# EAGLE board BradLightFlash.rev1-panou (EAGLE 6.5.0)
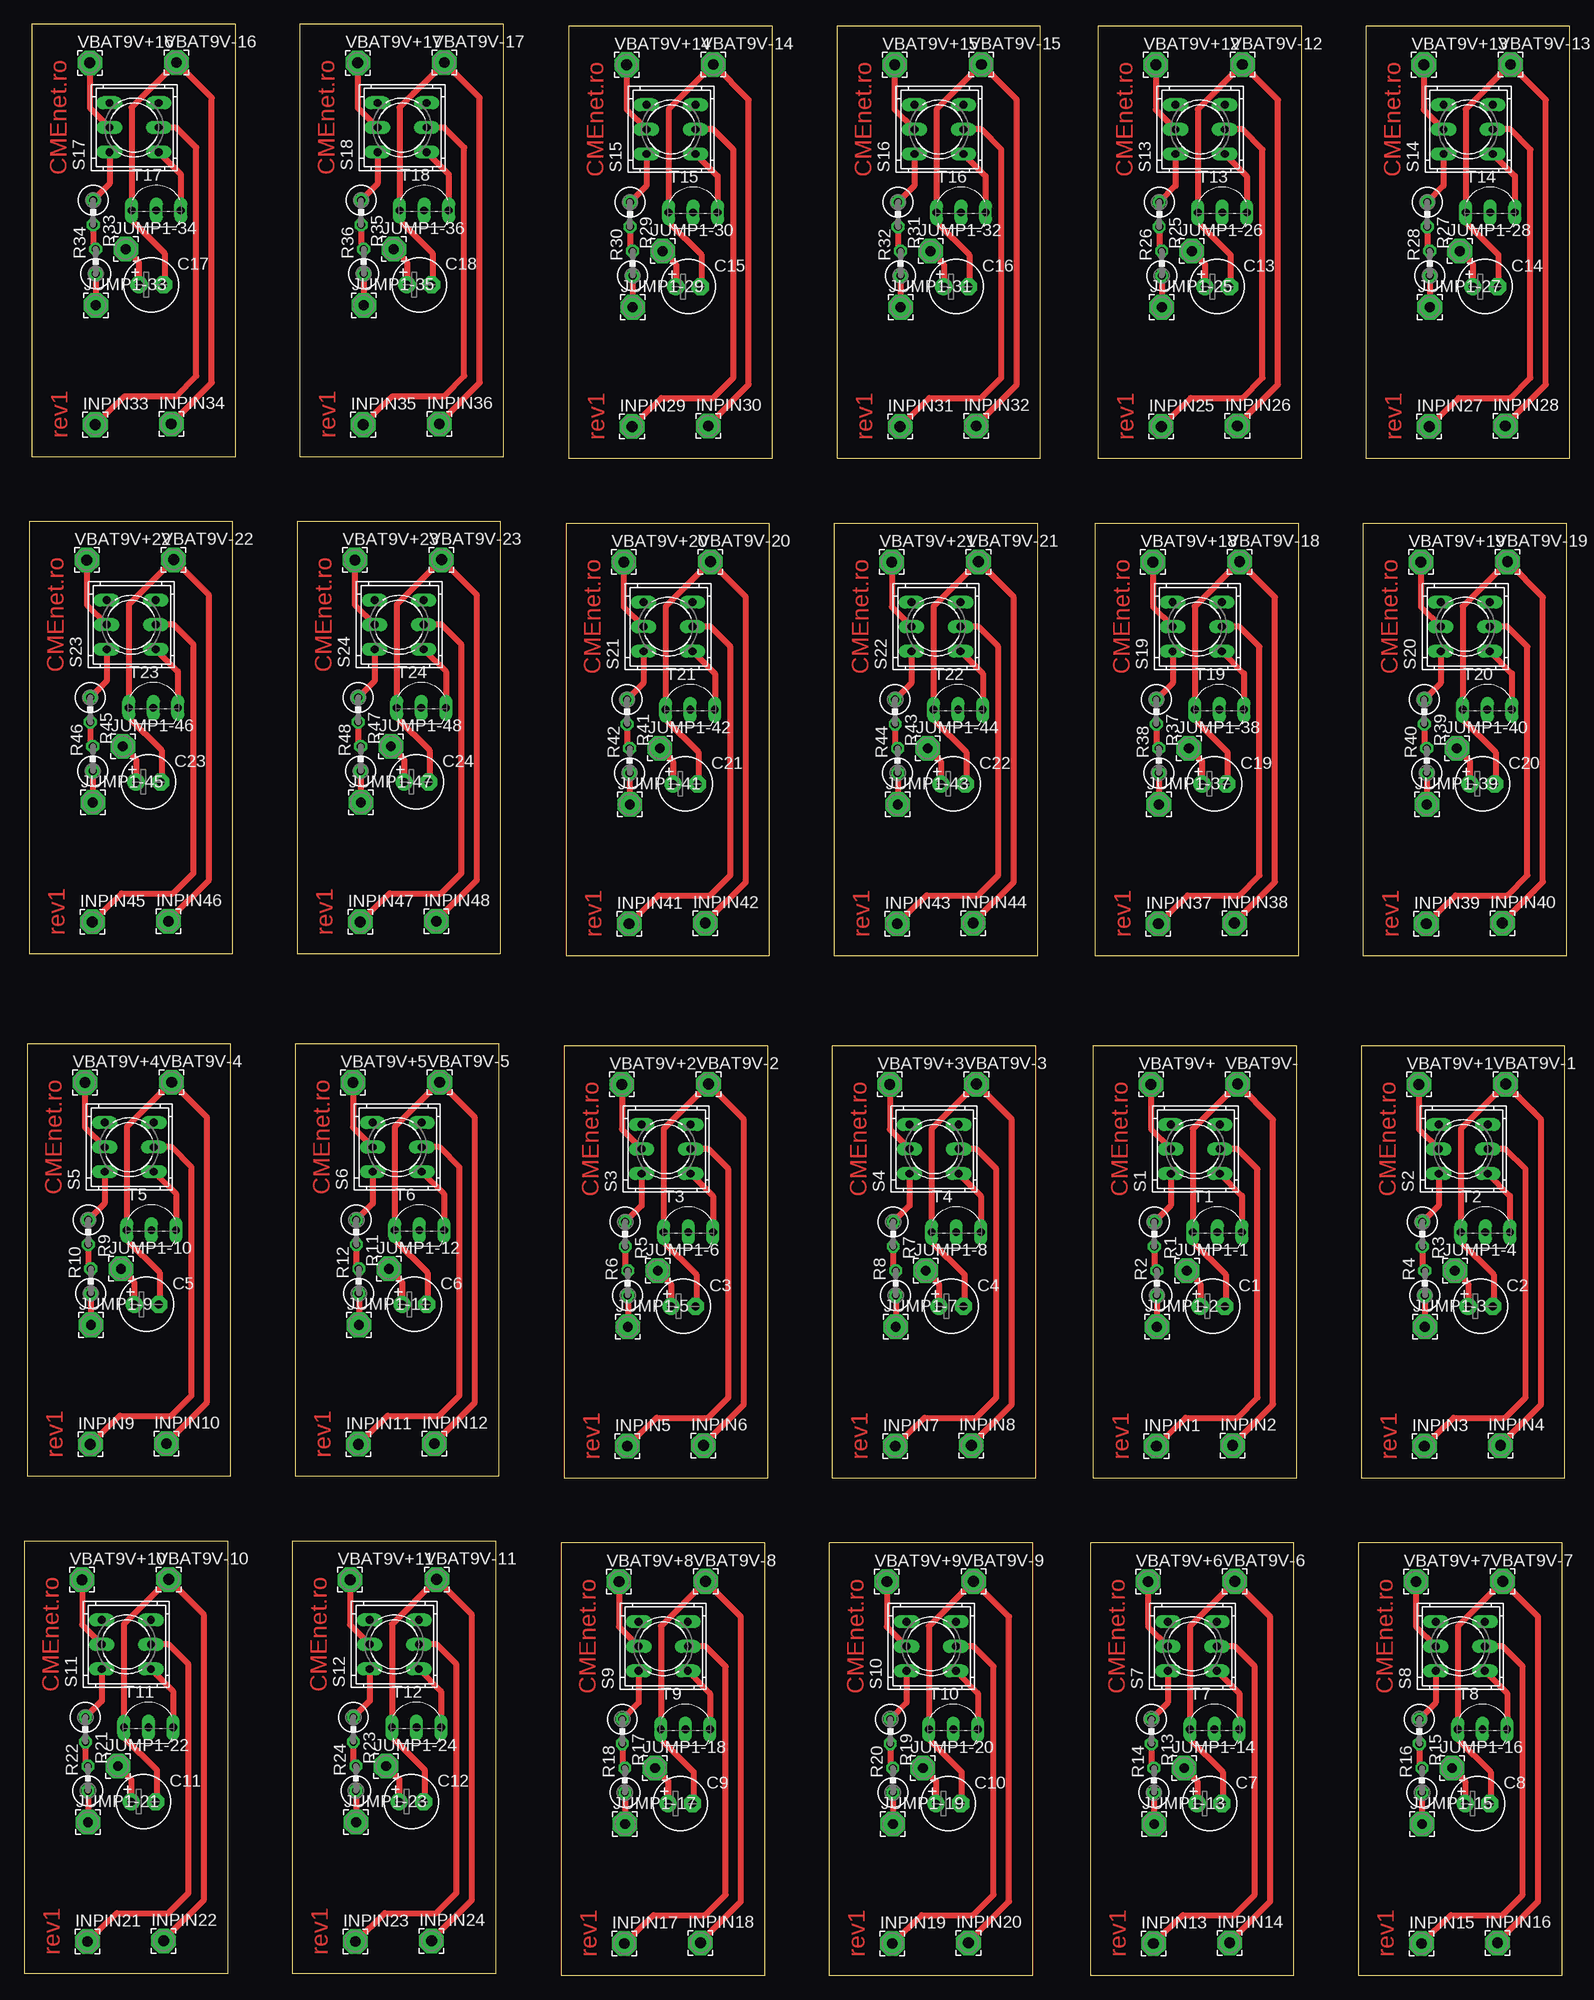
[diagram p0: board, top side]
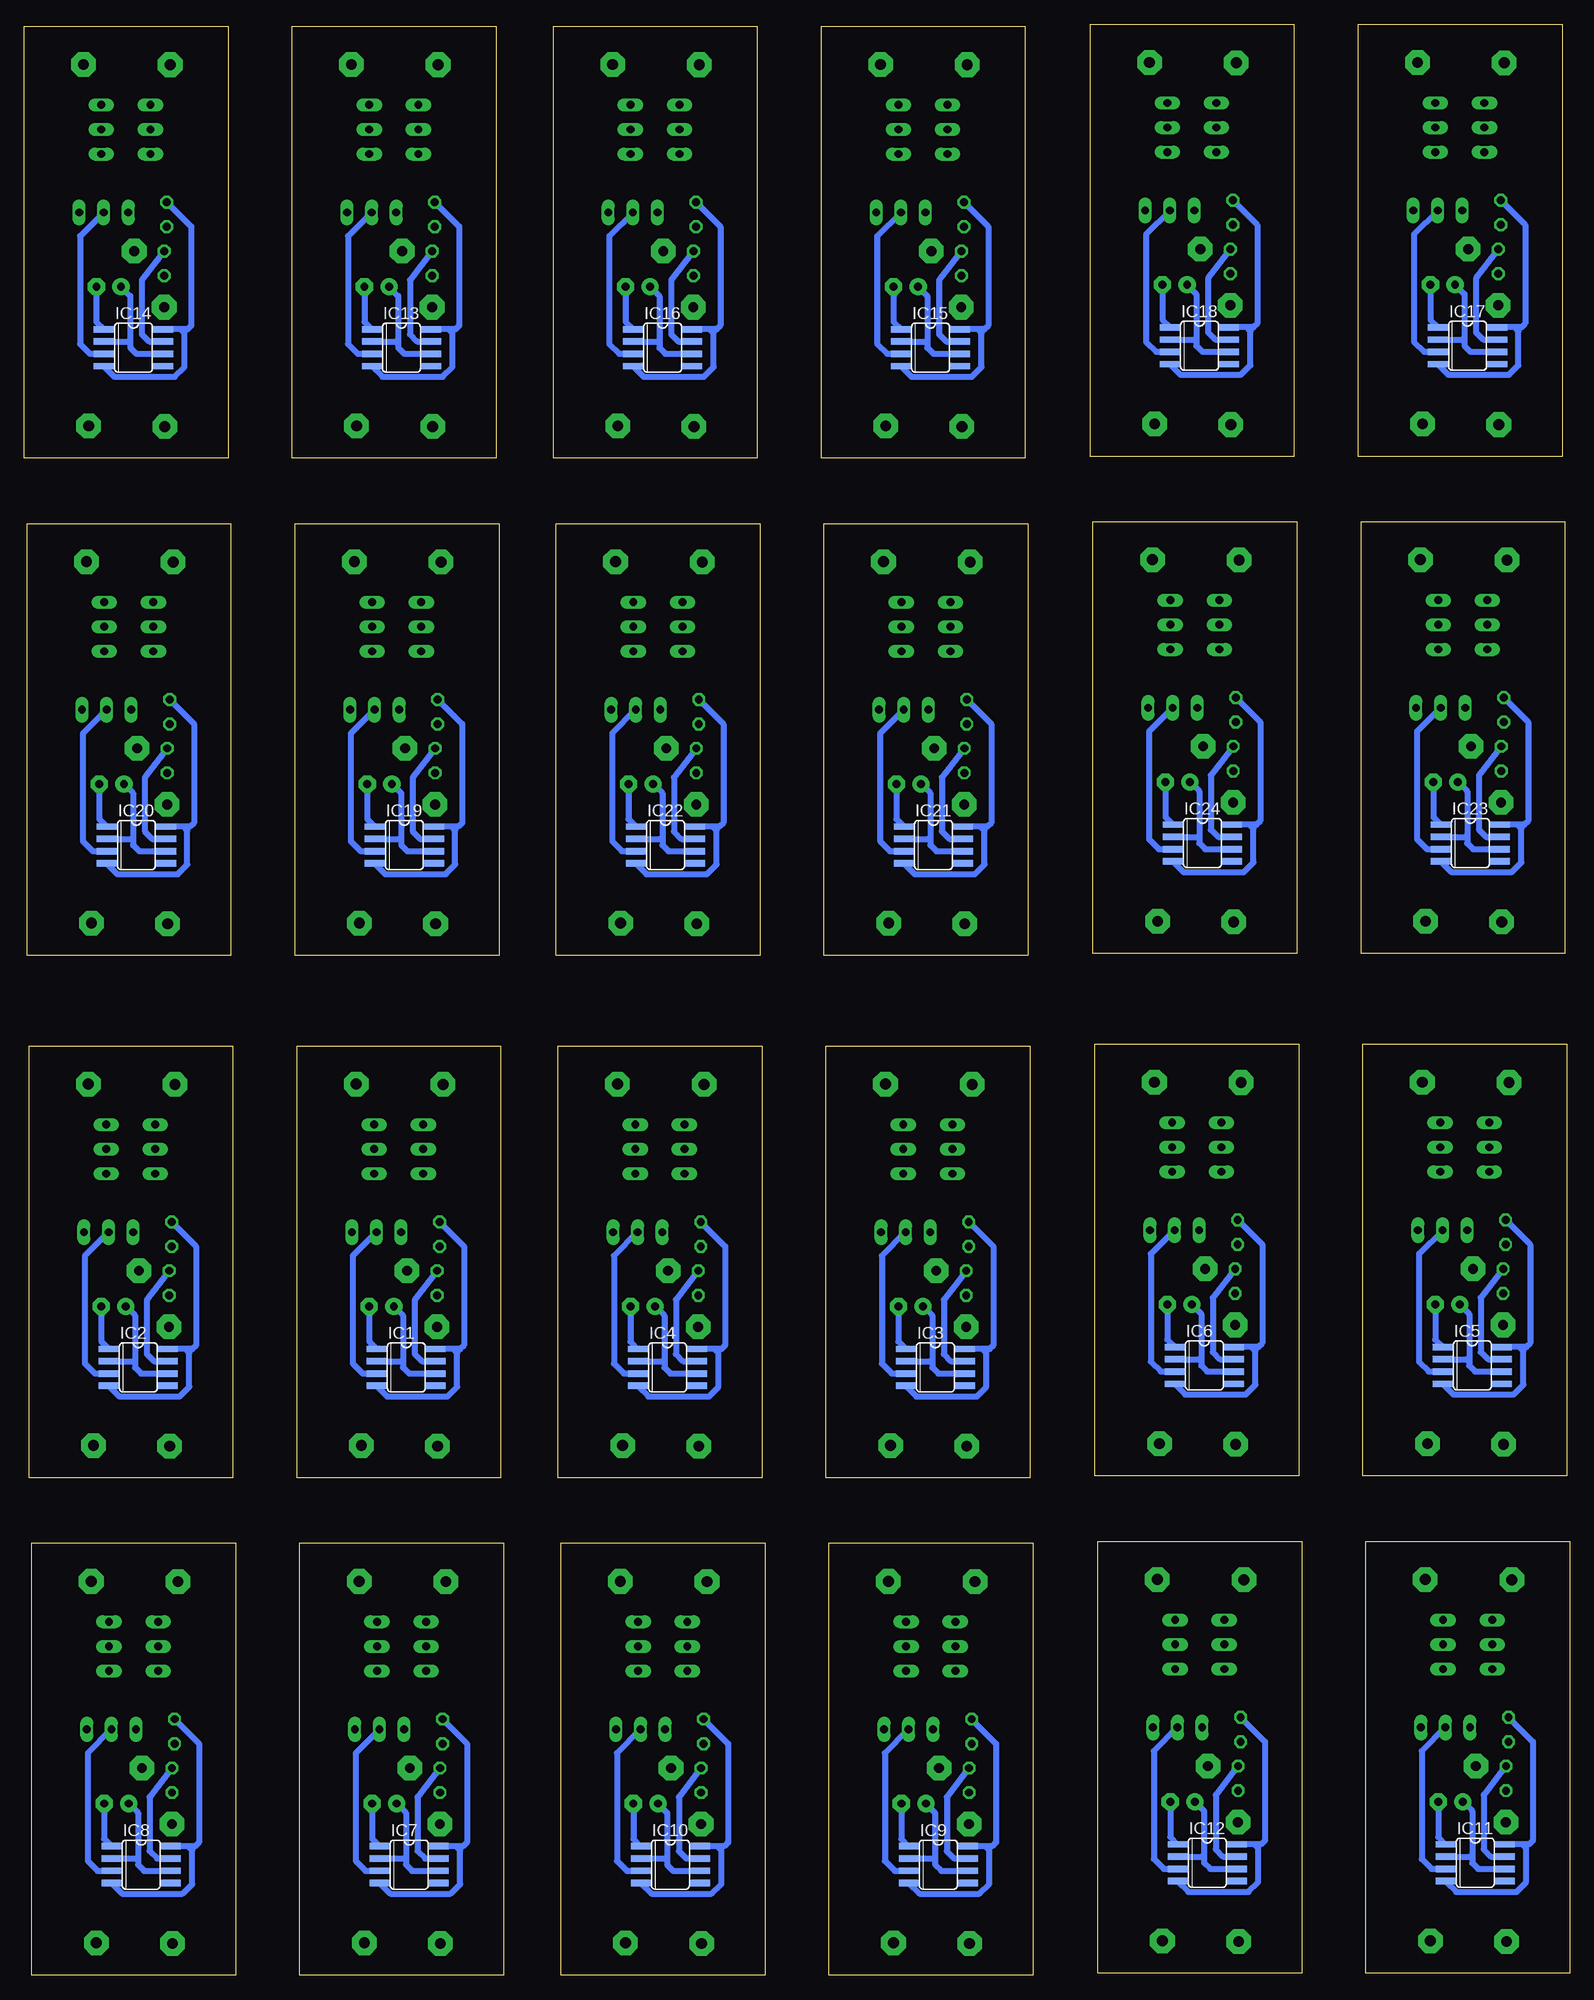
[diagram p1: board, bottom side, seen from below]

Size 159.77 x 201.68 mm. Coordinates in mm from the lower left corner, seen from the top.
Outline: 110.5,51.4 131.57,51.4 131.57,96.08 110.5,96.08 110.5,51.4
Outline: 138.2,51.4 159.27,51.4 159.27,96.08 138.2,96.08 138.2,51.4
Outline: 55.8,51.4 76.87,51.4 76.87,96.08 55.8,96.08 55.8,51.4
Outline: 83.5,51.4 104.57,51.4 104.57,96.08 83.5,96.08 83.5,51.4
Outline: 0.3,51.6 21.37,51.6 21.37,96.28 0.3,96.28 0.3,51.6
Outline: 28,51.6 49.07,51.6 49.07,96.28 28,96.28 28,51.6
Outline: 110.2,0 131.27,0 131.27,44.68 110.2,44.68 110.2,0
Outline: 137.9,0 158.97,0 158.97,44.68 137.9,44.68 137.9,0
Outline: 55.5,0 76.57,0 76.57,44.68 55.5,44.68 55.5,0
Outline: 83.2,0 104.27,0 104.27,44.68 83.2,44.68 83.2,0
Outline: 0,0.2 21.07,0.2 21.07,44.88 0,44.88 0,0.2
Outline: 27.7,0.2 48.77,0.2 48.77,44.88 27.7,44.88 27.7,0.2
Outline: 111,156.8 132.07,156.8 132.07,201.48 111,201.48 111,156.8
Outline: 138.7,156.8 159.77,156.8 159.77,201.48 138.7,201.48 138.7,156.8
Outline: 56.3,156.8 77.37,156.8 77.37,201.48 56.3,201.48 56.3,156.8
Outline: 84,156.8 105.07,156.8 105.07,201.48 84,201.48 84,156.8
Outline: 0.8,157 21.87,157 21.87,201.68 0.8,201.68 0.8,157
Outline: 28.5,157 49.57,157 49.57,201.68 28.5,201.68 28.5,157
Outline: 110.7,105.4 131.77,105.4 131.77,150.08 110.7,150.08 110.7,105.4
Outline: 138.4,105.4 159.47,105.4 159.47,150.08 138.4,150.08 138.4,105.4
Outline: 56,105.4 77.07,105.4 77.07,150.08 56,150.08 56,105.4
Outline: 83.7,105.4 104.77,105.4 104.77,150.08 83.7,150.08 83.7,105.4
Outline: 0.5,105.6 21.57,105.6 21.57,150.28 0.5,150.28 0.5,105.6
Outline: 28.2,105.6 49.27,105.6 49.27,150.28 28.2,150.28 28.2,105.6
Copper layers (1*16): Top 0.035mm / dielectric 1.5mm / Bottom 0.035mm
Design rules "default": minimum track width 10mil, minimum drill 24mil, track to track 8mil, track to pad 8mil, pad to pad 8mil, via to via 8mil, smd to smd 8mil, copper to edge 40mil, drill to drill 8mil, minimum pad ring 10mil, minimum via ring 8mil, stop-mask expansion 4mil, vias tented up to drill 0mil, thermal gap 10mil

## Footprints (pad centres in the part's own frame; a part is rotated, then mirrored left to right if it is on the bottom)
E2,5-6 = drill 0.813 pad 1.778: + -1.27,0 | drill 0.813 pad 1.778 octagon: - 1.27,0
SO08 = smd 0.66 x 2.032: 1 -1.905,-3.073; 2 -0.635,-3.073; 3 0.635,-3.073; 4 1.905,-3.073; 5 1.905,3.073; 6 0.635,3.073; 7 -0.635,3.073; 8 -1.905,3.073
2,54/1,1 = drill 1.118 pad 2.54 octagon: 1 0,0
2,54/1,0 = drill 1.016 pad 2.54 octagon: 1 0,0
0309V = drill 0.813 octagon: 1 -1.27,0; 2 1.27,0
9077-2 = drill 0.813 long: 1 -2.54,2.54; 2 0,2.54; 3 2.54,2.54; 4 -2.54,-2.54; 5 0,-2.54; 6 2.54,-2.54
TO92-EBC-OVAL = drill 0.813 long: B 0,-1.27; C 2.54,-1.27; E -2.54,-1.27

## Placement (x,y rotation side)
C1  470uF  [E2,5-6]  122.83,69.15 0 top
C2  470uF  [E2,5-6]  150.53,69.15 0 top
C3  470uF  [E2,5-6]  68.13,69.15 0 top
C4  470uF  [E2,5-6]  95.83,69.15 0 top
C5  470uF  [E2,5-6]  12.63,69.35 0 top
C6  470uF  [E2,5-6]  40.33,69.35 0 top
C7  470uF  [E2,5-6]  122.53,17.75 0 top
C8  470uF  [E2,5-6]  150.23,17.75 0 top
C9  470uF  [E2,5-6]  67.83,17.75 0 top
C10  470uF  [E2,5-6]  95.53,17.75 0 top
C11  470uF  [E2,5-6]  12.33,17.95 0 top
C12  470uF  [E2,5-6]  40.03,17.95 0 top
C13  470uF  [E2,5-6]  123.33,174.55 0 top
C14  470uF  [E2,5-6]  151.03,174.55 0 top
C15  470uF  [E2,5-6]  68.63,174.55 0 top
C16  470uF  [E2,5-6]  96.33,174.55 0 top
C17  470uF  [E2,5-6]  13.13,174.75 0 top
C18  470uF  [E2,5-6]  40.83,174.75 0 top
C19  470uF  [E2,5-6]  123.03,123.15 0 top
C20  470uF  [E2,5-6]  150.73,123.15 0 top
C21  470uF  [E2,5-6]  68.33,123.15 0 top
C22  470uF  [E2,5-6]  96.03,123.15 0 top
C23  470uF  [E2,5-6]  12.83,123.35 0 top
C24  470uF  [E2,5-6]  40.53,123.35 0 top
IC1  NE555D  [SO08]  120.27,62.84 270 bottom
IC2  NE555D  [SO08]  147.97,62.84 270 bottom
IC3  NE555D  [SO08]  65.57,62.84 270 bottom
IC4  NE555D  [SO08]  93.27,62.84 270 bottom
IC5  NE555D  [SO08]  10.07,63.04 270 bottom
IC6  NE555D  [SO08]  37.77,63.04 270 bottom
IC7  NE555D  [SO08]  119.97,11.44 270 bottom
IC8  NE555D  [SO08]  147.67,11.44 270 bottom
IC9  NE555D  [SO08]  65.27,11.44 270 bottom
IC10  NE555D  [SO08]  92.97,11.44 270 bottom
IC11  NE555D  [SO08]  9.77,11.64 270 bottom
IC12  NE555D  [SO08]  37.47,11.64 270 bottom
IC13  NE555D  [SO08]  120.77,168.24 270 bottom
IC14  NE555D  [SO08]  148.47,168.24 270 bottom
IC15  NE555D  [SO08]  66.07,168.24 270 bottom
IC16  NE555D  [SO08]  93.77,168.24 270 bottom
IC17  NE555D  [SO08]  10.57,168.44 270 bottom
IC18  NE555D  [SO08]  38.27,168.44 270 bottom
IC19  NE555D  [SO08]  120.47,116.84 270 bottom
IC20  NE555D  [SO08]  148.17,116.84 270 bottom
IC21  NE555D  [SO08]  65.77,116.84 270 bottom
IC22  NE555D  [SO08]  93.47,116.84 270 bottom
IC23  NE555D  [SO08]  10.27,117.04 270 bottom
IC24  NE555D  [SO08]  37.97,117.04 270 bottom
INPIN1  INPIN1  [2,54/1,1]  117.04,54.69 0 top
INPIN2  INPIN2  [2,54/1,1]  124.91,54.76 0 top
INPIN3  INPIN1  [2,54/1,1]  144.74,54.69 0 top
INPIN4  INPIN2  [2,54/1,1]  152.61,54.76 0 top
INPIN5  INPIN1  [2,54/1,1]  62.34,54.69 0 top
INPIN6  INPIN2  [2,54/1,1]  70.21,54.76 0 top
INPIN7  INPIN1  [2,54/1,1]  90.04,54.69 0 top
INPIN8  INPIN2  [2,54/1,1]  97.91,54.76 0 top
INPIN9  INPIN1  [2,54/1,1]  6.84,54.89 0 top
INPIN10  INPIN2  [2,54/1,1]  14.71,54.96 0 top
INPIN11  INPIN1  [2,54/1,1]  34.54,54.89 0 top
INPIN12  INPIN2  [2,54/1,1]  42.41,54.96 0 top
INPIN13  INPIN1  [2,54/1,1]  116.74,3.29 0 top
INPIN14  INPIN2  [2,54/1,1]  124.61,3.36 0 top
INPIN15  INPIN1  [2,54/1,1]  144.44,3.29 0 top
INPIN16  INPIN2  [2,54/1,1]  152.31,3.36 0 top
INPIN17  INPIN1  [2,54/1,1]  62.04,3.29 0 top
INPIN18  INPIN2  [2,54/1,1]  69.91,3.36 0 top
INPIN19  INPIN1  [2,54/1,1]  89.74,3.29 0 top
INPIN20  INPIN2  [2,54/1,1]  97.61,3.36 0 top
INPIN21  INPIN1  [2,54/1,1]  6.54,3.49 0 top
INPIN22  INPIN2  [2,54/1,1]  14.41,3.56 0 top
INPIN23  INPIN1  [2,54/1,1]  34.24,3.49 0 top
INPIN24  INPIN2  [2,54/1,1]  42.11,3.56 0 top
INPIN25  INPIN1  [2,54/1,1]  117.54,160.09 0 top
INPIN26  INPIN2  [2,54/1,1]  125.41,160.16 0 top
INPIN27  INPIN1  [2,54/1,1]  145.24,160.09 0 top
INPIN28  INPIN2  [2,54/1,1]  153.11,160.16 0 top
INPIN29  INPIN1  [2,54/1,1]  62.84,160.09 0 top
INPIN30  INPIN2  [2,54/1,1]  70.71,160.16 0 top
INPIN31  INPIN1  [2,54/1,1]  90.54,160.09 0 top
INPIN32  INPIN2  [2,54/1,1]  98.41,160.16 0 top
INPIN33  INPIN1  [2,54/1,1]  7.34,160.29 0 top
INPIN34  INPIN2  [2,54/1,1]  15.21,160.36 0 top
INPIN35  INPIN1  [2,54/1,1]  35.04,160.29 0 top
INPIN36  INPIN2  [2,54/1,1]  42.91,160.36 0 top
INPIN37  INPIN1  [2,54/1,1]  117.24,108.69 0 top
INPIN38  INPIN2  [2,54/1,1]  125.11,108.76 0 top
INPIN39  INPIN1  [2,54/1,1]  144.94,108.69 0 top
INPIN40  INPIN2  [2,54/1,1]  152.81,108.76 0 top
INPIN41  INPIN1  [2,54/1,1]  62.54,108.69 0 top
INPIN42  INPIN2  [2,54/1,1]  70.41,108.76 0 top
INPIN43  INPIN1  [2,54/1,1]  90.24,108.69 0 top
INPIN44  INPIN2  [2,54/1,1]  98.11,108.76 0 top
INPIN45  INPIN1  [2,54/1,1]  7.04,108.89 0 top
INPIN46  INPIN2  [2,54/1,1]  14.91,108.96 0 top
INPIN47  INPIN1  [2,54/1,1]  34.74,108.89 0 top
INPIN48  INPIN2  [2,54/1,1]  42.61,108.96 0 top
JUMP1-1  [2,54/1,0]  120.2,72.83 0 top
JUMP1-2  [2,54/1,0]  117.1,67.03 0 top
JUMP1-3  [2,54/1,0]  144.8,67.03 0 top
JUMP1-4  [2,54/1,0]  147.9,72.83 0 top
JUMP1-5  [2,54/1,0]  62.4,67.03 0 top
JUMP1-6  [2,54/1,0]  65.5,72.83 0 top
JUMP1-7  [2,54/1,0]  90.1,67.03 0 top
JUMP1-8  [2,54/1,0]  93.2,72.83 0 top
JUMP1-9  [2,54/1,0]  6.9,67.23 0 top
JUMP1-10  [2,54/1,0]  10,73.03 0 top
JUMP1-11  [2,54/1,0]  34.6,67.23 0 top
JUMP1-12  [2,54/1,0]  37.7,73.03 0 top
JUMP1-13  [2,54/1,0]  116.8,15.63 0 top
JUMP1-14  [2,54/1,0]  119.9,21.43 0 top
JUMP1-15  [2,54/1,0]  144.5,15.63 0 top
JUMP1-16  [2,54/1,0]  147.6,21.43 0 top
JUMP1-17  [2,54/1,0]  62.1,15.63 0 top
JUMP1-18  [2,54/1,0]  65.2,21.43 0 top
JUMP1-19  [2,54/1,0]  89.8,15.63 0 top
JUMP1-20  [2,54/1,0]  92.9,21.43 0 top
JUMP1-21  [2,54/1,0]  6.6,15.83 0 top
JUMP1-22  [2,54/1,0]  9.7,21.63 0 top
JUMP1-23  [2,54/1,0]  34.3,15.83 0 top
JUMP1-24  [2,54/1,0]  37.4,21.63 0 top
JUMP1-25  [2,54/1,0]  117.6,172.43 0 top
JUMP1-26  [2,54/1,0]  120.7,178.23 0 top
JUMP1-27  [2,54/1,0]  145.3,172.43 0 top
JUMP1-28  [2,54/1,0]  148.4,178.23 0 top
JUMP1-29  [2,54/1,0]  62.9,172.43 0 top
JUMP1-30  [2,54/1,0]  66,178.23 0 top
JUMP1-31  [2,54/1,0]  90.6,172.43 0 top
JUMP1-32  [2,54/1,0]  93.7,178.23 0 top
JUMP1-33  [2,54/1,0]  7.4,172.63 0 top
JUMP1-34  [2,54/1,0]  10.5,178.43 0 top
JUMP1-35  [2,54/1,0]  35.1,172.63 0 top
JUMP1-36  [2,54/1,0]  38.2,178.43 0 top
JUMP1-37  [2,54/1,0]  117.3,121.03 0 top
JUMP1-38  [2,54/1,0]  120.4,126.83 0 top
JUMP1-39  [2,54/1,0]  145,121.03 0 top
JUMP1-40  [2,54/1,0]  148.1,126.83 0 top
JUMP1-41  [2,54/1,0]  62.6,121.03 0 top
JUMP1-42  [2,54/1,0]  65.7,126.83 0 top
JUMP1-43  [2,54/1,0]  90.3,121.03 0 top
JUMP1-44  [2,54/1,0]  93.4,126.83 0 top
JUMP1-45  [2,54/1,0]  7.1,121.23 0 top
JUMP1-46  [2,54/1,0]  10.2,127.03 0 top
JUMP1-47  [2,54/1,0]  34.8,121.23 0 top
JUMP1-48  [2,54/1,0]  37.9,127.03 0 top
R1  1K  [0309V]  116.83,76.61 270 top
R2  1k  [0309V]  117.09,71.56 90 top
R3  1K  [0309V]  144.53,76.61 270 top
R4  1k  [0309V]  144.79,71.56 90 top
R5  1K  [0309V]  62.13,76.61 270 top
R6  1k  [0309V]  62.39,71.56 90 top
R7  1K  [0309V]  89.83,76.61 270 top
R8  1k  [0309V]  90.09,71.56 90 top
R9  1K  [0309V]  6.63,76.81 270 top
R10  1k  [0309V]  6.89,71.76 90 top
R11  1K  [0309V]  34.33,76.81 270 top
R12  1k  [0309V]  34.59,71.76 90 top
R13  1K  [0309V]  116.53,25.21 270 top
R14  1k  [0309V]  116.79,20.16 90 top
R15  1K  [0309V]  144.23,25.21 270 top
R16  1k  [0309V]  144.49,20.16 90 top
R17  1K  [0309V]  61.83,25.21 270 top
R18  1k  [0309V]  62.09,20.16 90 top
R19  1K  [0309V]  89.53,25.21 270 top
R20  1k  [0309V]  89.79,20.16 90 top
R21  1K  [0309V]  6.33,25.41 270 top
R22  1k  [0309V]  6.59,20.36 90 top
R23  1K  [0309V]  34.03,25.41 270 top
R24  1k  [0309V]  34.29,20.36 90 top
R25  1K  [0309V]  117.33,182.01 270 top
R26  1k  [0309V]  117.59,176.96 90 top
R27  1K  [0309V]  145.03,182.01 270 top
R28  1k  [0309V]  145.29,176.96 90 top
R29  1K  [0309V]  62.63,182.01 270 top
R30  1k  [0309V]  62.89,176.96 90 top
R31  1K  [0309V]  90.33,182.01 270 top
R32  1k  [0309V]  90.59,176.96 90 top
R33  1K  [0309V]  7.13,182.21 270 top
R34  1k  [0309V]  7.39,177.16 90 top
R35  1K  [0309V]  34.83,182.21 270 top
R36  1k  [0309V]  35.09,177.16 90 top
R37  1K  [0309V]  117.03,130.61 270 top
R38  1k  [0309V]  117.29,125.56 90 top
R39  1K  [0309V]  144.73,130.61 270 top
R40  1k  [0309V]  144.99,125.56 90 top
R41  1K  [0309V]  62.33,130.61 270 top
R42  1k  [0309V]  62.59,125.56 90 top
R43  1K  [0309V]  90.03,130.61 270 top
R44  1k  [0309V]  90.29,125.56 90 top
R45  1K  [0309V]  6.83,130.81 270 top
R46  1k  [0309V]  7.09,125.76 90 top
R47  1K  [0309V]  34.53,130.81 270 top
R48  1k  [0309V]  34.79,125.76 90 top
S1  9077-2  [9077-2]  121.06,85.4 90 top
S2  9077-2  [9077-2]  148.76,85.4 90 top
S3  9077-2  [9077-2]  66.36,85.4 90 top
S4  9077-2  [9077-2]  94.06,85.4 90 top
S5  9077-2  [9077-2]  10.86,85.6 90 top
S6  9077-2  [9077-2]  38.56,85.6 90 top
S7  9077-2  [9077-2]  120.76,34 90 top
S8  9077-2  [9077-2]  148.46,34 90 top
S9  9077-2  [9077-2]  66.06,34 90 top
S10  9077-2  [9077-2]  93.76,34 90 top
S11  9077-2  [9077-2]  10.56,34.2 90 top
S12  9077-2  [9077-2]  38.26,34.2 90 top
S13  9077-2  [9077-2]  121.56,190.8 90 top
S14  9077-2  [9077-2]  149.26,190.8 90 top
S15  9077-2  [9077-2]  66.86,190.8 90 top
S16  9077-2  [9077-2]  94.56,190.8 90 top
S17  9077-2  [9077-2]  11.36,191 90 top
S18  9077-2  [9077-2]  39.06,191 90 top
S19  9077-2  [9077-2]  121.26,139.4 90 top
S20  9077-2  [9077-2]  148.96,139.4 90 top
S21  9077-2  [9077-2]  66.56,139.4 90 top
S22  9077-2  [9077-2]  94.26,139.4 90 top
S23  9077-2  [9077-2]  11.06,139.6 90 top
S24  9077-2  [9077-2]  38.76,139.6 90 top
T1  2N2222  [TO92-EBC-OVAL]  123.35,78.09 0 top
T2  2N2222  [TO92-EBC-OVAL]  151.05,78.09 0 top
T3  2N2222  [TO92-EBC-OVAL]  68.65,78.09 0 top
T4  2N2222  [TO92-EBC-OVAL]  96.35,78.09 0 top
T5  2N2222  [TO92-EBC-OVAL]  13.15,78.29 0 top
T6  2N2222  [TO92-EBC-OVAL]  40.85,78.29 0 top
T7  2N2222  [TO92-EBC-OVAL]  123.05,26.69 0 top
T8  2N2222  [TO92-EBC-OVAL]  150.75,26.69 0 top
T9  2N2222  [TO92-EBC-OVAL]  68.35,26.69 0 top
T10  2N2222  [TO92-EBC-OVAL]  96.05,26.69 0 top
T11  2N2222  [TO92-EBC-OVAL]  12.85,26.89 0 top
T12  2N2222  [TO92-EBC-OVAL]  40.55,26.89 0 top
T13  2N2222  [TO92-EBC-OVAL]  123.85,183.49 0 top
T14  2N2222  [TO92-EBC-OVAL]  151.55,183.49 0 top
T15  2N2222  [TO92-EBC-OVAL]  69.15,183.49 0 top
T16  2N2222  [TO92-EBC-OVAL]  96.85,183.49 0 top
T17  2N2222  [TO92-EBC-OVAL]  13.65,183.69 0 top
T18  2N2222  [TO92-EBC-OVAL]  41.35,183.69 0 top
T19  2N2222  [TO92-EBC-OVAL]  123.55,132.09 0 top
T20  2N2222  [TO92-EBC-OVAL]  151.25,132.09 0 top
T21  2N2222  [TO92-EBC-OVAL]  68.85,132.09 0 top
T22  2N2222  [TO92-EBC-OVAL]  96.55,132.09 0 top
T23  2N2222  [TO92-EBC-OVAL]  13.35,132.29 0 top
T24  2N2222  [TO92-EBC-OVAL]  41.05,132.29 0 top
VBAT9V+  VBAT9v+  [2,54/1,1]  116.48,92.09 0 top
VBAT9V+1  VBAT9v+  [2,54/1,1]  144.18,92.09 0 top
VBAT9V+2  VBAT9v+  [2,54/1,1]  61.78,92.09 0 top
VBAT9V+3  VBAT9v+  [2,54/1,1]  89.48,92.09 0 top
VBAT9V+4  VBAT9v+  [2,54/1,1]  6.28,92.29 0 top
VBAT9V+5  VBAT9v+  [2,54/1,1]  33.98,92.29 0 top
VBAT9V+6  VBAT9v+  [2,54/1,1]  116.18,40.69 0 top
VBAT9V+7  VBAT9v+  [2,54/1,1]  143.88,40.69 0 top
VBAT9V+8  VBAT9v+  [2,54/1,1]  61.48,40.69 0 top
VBAT9V+9  VBAT9v+  [2,54/1,1]  89.18,40.69 0 top
VBAT9V+10  VBAT9v+  [2,54/1,1]  5.98,40.89 0 top
VBAT9V+11  VBAT9v+  [2,54/1,1]  33.68,40.89 0 top
VBAT9V+12  VBAT9v+  [2,54/1,1]  116.98,197.49 0 top
VBAT9V+13  VBAT9v+  [2,54/1,1]  144.68,197.49 0 top
VBAT9V+14  VBAT9v+  [2,54/1,1]  62.28,197.49 0 top
VBAT9V+15  VBAT9v+  [2,54/1,1]  89.98,197.49 0 top
VBAT9V+16  VBAT9v+  [2,54/1,1]  6.78,197.69 0 top
VBAT9V+17  VBAT9v+  [2,54/1,1]  34.48,197.69 0 top
VBAT9V+18  VBAT9v+  [2,54/1,1]  116.68,146.09 0 top
VBAT9V+19  VBAT9v+  [2,54/1,1]  144.38,146.09 0 top
VBAT9V+20  VBAT9v+  [2,54/1,1]  61.98,146.09 0 top
VBAT9V+21  VBAT9v+  [2,54/1,1]  89.68,146.09 0 top
VBAT9V+22  VBAT9v+  [2,54/1,1]  6.48,146.29 0 top
VBAT9V+23  VBAT9v+  [2,54/1,1]  34.18,146.29 0 top
VBAT9V-  VBAT9v-  [2,54/1,1]  125.44,92.12 0 top
VBAT9V-1  VBAT9v-  [2,54/1,1]  153.14,92.12 0 top
VBAT9V-2  VBAT9v-  [2,54/1,1]  70.74,92.12 0 top
VBAT9V-3  VBAT9v-  [2,54/1,1]  98.44,92.12 0 top
VBAT9V-4  VBAT9v-  [2,54/1,1]  15.24,92.32 0 top
VBAT9V-5  VBAT9v-  [2,54/1,1]  42.94,92.32 0 top
VBAT9V-6  VBAT9v-  [2,54/1,1]  125.14,40.72 0 top
VBAT9V-7  VBAT9v-  [2,54/1,1]  152.84,40.72 0 top
VBAT9V-8  VBAT9v-  [2,54/1,1]  70.44,40.72 0 top
VBAT9V-9  VBAT9v-  [2,54/1,1]  98.14,40.72 0 top
VBAT9V-10  VBAT9v-  [2,54/1,1]  14.94,40.92 0 top
VBAT9V-11  VBAT9v-  [2,54/1,1]  42.64,40.92 0 top
VBAT9V-12  VBAT9v-  [2,54/1,1]  125.94,197.52 0 top
VBAT9V-13  VBAT9v-  [2,54/1,1]  153.64,197.52 0 top
VBAT9V-14  VBAT9v-  [2,54/1,1]  71.24,197.52 0 top
VBAT9V-15  VBAT9v-  [2,54/1,1]  98.94,197.52 0 top
VBAT9V-16  VBAT9v-  [2,54/1,1]  15.74,197.72 0 top
VBAT9V-17  VBAT9v-  [2,54/1,1]  43.44,197.72 0 top
VBAT9V-18  VBAT9v-  [2,54/1,1]  125.64,146.12 0 top
VBAT9V-19  VBAT9v-  [2,54/1,1]  153.34,146.12 0 top
VBAT9V-20  VBAT9v-  [2,54/1,1]  70.94,146.12 0 top
VBAT9V-21  VBAT9v-  [2,54/1,1]  98.64,146.12 0 top
VBAT9V-22  VBAT9v-  [2,54/1,1]  15.44,146.32 0 top
VBAT9V-23  VBAT9v-  [2,54/1,1]  43.14,146.32 0 top

## Library data of the parts
C1-C24 IC1-IC24 R1-R48 T1-T24 = adafruit
INPIN1-INPIN48 JUMP1-1-JUMP1-48 VBAT9V+ VBAT9V+1-VBAT9V+23 VBAT9V- VBAT9V-1-VBAT9V-23 = wirepad
S1-S24 = switch-misc

## Nets
N$1: S1.2 VBAT9V+.1
N$2: IC1.4 IC1.8 R1.1 S1.1
N$3: C1.- IC1.1 INPIN2.1 T1.E VBAT9V-.1
N$4: C1.+ IC1.2 IC1.6 JUMP1-1.1
N$5: JUMP1-2.1 R2.1
N$6: IC1.7 R1.2 R2.2
N$7: IC1.3 T1.B
N$8: S1.4 T1.C
N$9: S2.2 VBAT9V+1.1
N$10: INPIN1.1 S1.5
N$11: IC2.4 IC2.8 R3.1 S2.1
N$12: C2.- IC2.1 INPIN4.1 T2.E VBAT9V-1.1
N$13: C2.+ IC2.2 IC2.6 JUMP1-4.1
N$14: IC2.7 R3.2 R4.2
N$15: IC2.3 T2.B
N$16: S2.4 T2.C
N$17: INPIN3.1 S2.5
N$18: JUMP1-3.1 R4.1
N$19: S3.2 VBAT9V+2.1
N$20: IC3.4 IC3.8 R5.1 S3.1
N$21: C3.- IC3.1 INPIN6.1 T3.E VBAT9V-2.1
N$22: C3.+ IC3.2 IC3.6 JUMP1-6.1
N$23: IC3.7 R5.2 R6.2
N$24: IC3.3 T3.B
N$25: S3.4 T3.C
N$26: INPIN5.1 S3.5
N$27: JUMP1-5.1 R6.1
N$28: S4.2 VBAT9V+3.1
N$29: IC4.4 IC4.8 R7.1 S4.1
N$30: C4.- IC4.1 INPIN8.1 T4.E VBAT9V-3.1
N$31: C4.+ IC4.2 IC4.6 JUMP1-8.1
N$32: IC4.7 R7.2 R8.2
N$33: IC4.3 T4.B
N$34: S4.4 T4.C
N$35: INPIN7.1 S4.5
N$36: JUMP1-7.1 R8.1
N$37: S5.2 VBAT9V+4.1
N$38: IC5.4 IC5.8 R9.1 S5.1
N$39: C5.- IC5.1 INPIN10.1 T5.E VBAT9V-4.1
N$40: C5.+ IC5.2 IC5.6 JUMP1-10.1
N$41: IC5.7 R9.2 R10.2
N$42: IC5.3 T5.B
N$43: S5.4 T5.C
N$44: INPIN9.1 S5.5
N$45: JUMP1-9.1 R10.1
N$46: S6.2 VBAT9V+5.1
N$47: IC6.4 IC6.8 R11.1 S6.1
N$48: C6.- IC6.1 INPIN12.1 T6.E VBAT9V-5.1
N$49: C6.+ IC6.2 IC6.6 JUMP1-12.1
N$50: IC6.7 R11.2 R12.2
N$51: IC6.3 T6.B
N$52: S6.4 T6.C
N$53: INPIN11.1 S6.5
N$54: JUMP1-11.1 R12.1
N$55: S7.2 VBAT9V+6.1
N$56: IC7.4 IC7.8 R13.1 S7.1
N$57: C7.- IC7.1 INPIN14.1 T7.E VBAT9V-6.1
N$58: C7.+ IC7.2 IC7.6 JUMP1-14.1
N$59: IC7.7 R13.2 R14.2
N$60: IC7.3 T7.B
N$61: S7.4 T7.C
N$62: INPIN13.1 S7.5
N$63: JUMP1-13.1 R14.1
N$64: S8.2 VBAT9V+7.1
N$65: IC8.4 IC8.8 R15.1 S8.1
N$66: C8.- IC8.1 INPIN16.1 T8.E VBAT9V-7.1
N$67: C8.+ IC8.2 IC8.6 JUMP1-16.1
N$68: IC8.7 R15.2 R16.2
N$69: IC8.3 T8.B
N$70: S8.4 T8.C
N$71: INPIN15.1 S8.5
N$72: JUMP1-15.1 R16.1
N$73: S9.2 VBAT9V+8.1
N$74: IC9.4 IC9.8 R17.1 S9.1
N$75: C9.- IC9.1 INPIN18.1 T9.E VBAT9V-8.1
N$76: C9.+ IC9.2 IC9.6 JUMP1-18.1
N$77: IC9.7 R17.2 R18.2
N$78: IC9.3 T9.B
N$79: S9.4 T9.C
N$80: INPIN17.1 S9.5
N$81: JUMP1-17.1 R18.1
N$82: S10.2 VBAT9V+9.1
N$83: IC10.4 IC10.8 R19.1 S10.1
N$84: C10.- IC10.1 INPIN20.1 T10.E VBAT9V-9.1
N$85: C10.+ IC10.2 IC10.6 JUMP1-20.1
N$86: IC10.7 R19.2 R20.2
N$87: IC10.3 T10.B
N$88: S10.4 T10.C
N$89: INPIN19.1 S10.5
N$90: JUMP1-19.1 R20.1
N$91: S11.2 VBAT9V+10.1
N$92: IC11.4 IC11.8 R21.1 S11.1
N$93: C11.- IC11.1 INPIN22.1 T11.E VBAT9V-10.1
N$94: C11.+ IC11.2 IC11.6 JUMP1-22.1
N$95: IC11.7 R21.2 R22.2
N$96: IC11.3 T11.B
N$97: S11.4 T11.C
N$98: INPIN21.1 S11.5
N$99: JUMP1-21.1 R22.1
N$100: S12.2 VBAT9V+11.1
N$101: IC12.4 IC12.8 R23.1 S12.1
N$102: C12.- IC12.1 INPIN24.1 T12.E VBAT9V-11.1
N$103: C12.+ IC12.2 IC12.6 JUMP1-24.1
N$104: IC12.7 R23.2 R24.2
N$105: IC12.3 T12.B
N$106: S12.4 T12.C
N$107: INPIN23.1 S12.5
N$108: JUMP1-23.1 R24.1
N$109: S13.2 VBAT9V+12.1
N$110: IC13.4 IC13.8 R25.1 S13.1
N$111: C13.- IC13.1 INPIN26.1 T13.E VBAT9V-12.1
N$112: C13.+ IC13.2 IC13.6 JUMP1-26.1
N$113: IC13.7 R25.2 R26.2
N$114: IC13.3 T13.B
N$115: S13.4 T13.C
N$116: INPIN25.1 S13.5
N$117: JUMP1-25.1 R26.1
N$118: S14.2 VBAT9V+13.1
N$119: IC14.4 IC14.8 R27.1 S14.1
N$120: C14.- IC14.1 INPIN28.1 T14.E VBAT9V-13.1
N$121: C14.+ IC14.2 IC14.6 JUMP1-28.1
N$122: IC14.7 R27.2 R28.2
N$123: IC14.3 T14.B
N$124: S14.4 T14.C
N$125: INPIN27.1 S14.5
N$126: JUMP1-27.1 R28.1
N$127: S15.2 VBAT9V+14.1
N$128: IC15.4 IC15.8 R29.1 S15.1
N$129: C15.- IC15.1 INPIN30.1 T15.E VBAT9V-14.1
N$130: C15.+ IC15.2 IC15.6 JUMP1-30.1
N$131: IC15.7 R29.2 R30.2
N$132: IC15.3 T15.B
N$133: S15.4 T15.C
N$134: INPIN29.1 S15.5
N$135: JUMP1-29.1 R30.1
N$136: S16.2 VBAT9V+15.1
N$137: IC16.4 IC16.8 R31.1 S16.1
N$138: C16.- IC16.1 INPIN32.1 T16.E VBAT9V-15.1
N$139: C16.+ IC16.2 IC16.6 JUMP1-32.1
N$140: IC16.7 R31.2 R32.2
N$141: IC16.3 T16.B
N$142: S16.4 T16.C
N$143: INPIN31.1 S16.5
N$144: JUMP1-31.1 R32.1
N$145: S17.2 VBAT9V+16.1
N$146: IC17.4 IC17.8 R33.1 S17.1
N$147: C17.- IC17.1 INPIN34.1 T17.E VBAT9V-16.1
N$148: C17.+ IC17.2 IC17.6 JUMP1-34.1
N$149: IC17.7 R33.2 R34.2
N$150: IC17.3 T17.B
N$151: S17.4 T17.C
N$152: INPIN33.1 S17.5
N$153: JUMP1-33.1 R34.1
N$154: S18.2 VBAT9V+17.1
N$155: IC18.4 IC18.8 R35.1 S18.1
N$156: C18.- IC18.1 INPIN36.1 T18.E VBAT9V-17.1
N$157: C18.+ IC18.2 IC18.6 JUMP1-36.1
N$158: IC18.7 R35.2 R36.2
N$159: IC18.3 T18.B
N$160: S18.4 T18.C
N$161: INPIN35.1 S18.5
N$162: JUMP1-35.1 R36.1
N$163: S19.2 VBAT9V+18.1
N$164: IC19.4 IC19.8 R37.1 S19.1
N$165: C19.- IC19.1 INPIN38.1 T19.E VBAT9V-18.1
N$166: C19.+ IC19.2 IC19.6 JUMP1-38.1
N$167: IC19.7 R37.2 R38.2
N$168: IC19.3 T19.B
N$169: S19.4 T19.C
N$170: INPIN37.1 S19.5
N$171: JUMP1-37.1 R38.1
N$172: S20.2 VBAT9V+19.1
N$173: IC20.4 IC20.8 R39.1 S20.1
N$174: C20.- IC20.1 INPIN40.1 T20.E VBAT9V-19.1
N$175: C20.+ IC20.2 IC20.6 JUMP1-40.1
N$176: IC20.7 R39.2 R40.2
N$177: IC20.3 T20.B
N$178: S20.4 T20.C
N$179: INPIN39.1 S20.5
N$180: JUMP1-39.1 R40.1
N$181: S21.2 VBAT9V+20.1
N$182: IC21.4 IC21.8 R41.1 S21.1
N$183: C21.- IC21.1 INPIN42.1 T21.E VBAT9V-20.1
N$184: C21.+ IC21.2 IC21.6 JUMP1-42.1
N$185: IC21.7 R41.2 R42.2
N$186: IC21.3 T21.B
N$187: S21.4 T21.C
N$188: INPIN41.1 S21.5
N$189: JUMP1-41.1 R42.1
N$190: S22.2 VBAT9V+21.1
N$191: IC22.4 IC22.8 R43.1 S22.1
N$192: C22.- IC22.1 INPIN44.1 T22.E VBAT9V-21.1
N$193: C22.+ IC22.2 IC22.6 JUMP1-44.1
N$194: IC22.7 R43.2 R44.2
N$195: IC22.3 T22.B
N$196: S22.4 T22.C
N$197: INPIN43.1 S22.5
N$198: JUMP1-43.1 R44.1
N$199: S23.2 VBAT9V+22.1
N$200: IC23.4 IC23.8 R45.1 S23.1
N$201: C23.- IC23.1 INPIN46.1 T23.E VBAT9V-22.1
N$202: C23.+ IC23.2 IC23.6 JUMP1-46.1
N$203: IC23.7 R45.2 R46.2
N$204: IC23.3 T23.B
N$205: S23.4 T23.C
N$206: INPIN45.1 S23.5
N$207: JUMP1-45.1 R46.1
N$208: S24.2 VBAT9V+23.1
N$209: IC24.4 IC24.8 R47.1 S24.1
N$210: C24.- IC24.1 INPIN48.1 T24.E VBAT9V-23.1
N$211: C24.+ IC24.2 IC24.6 JUMP1-48.1
N$212: IC24.7 R47.2 R48.2
N$213: IC24.3 T24.B
N$214: S24.4 T24.C
N$215: INPIN47.1 S24.5
N$216: JUMP1-47.1 R48.1

## Tracks (layer width: path | path; a pad name or v marks a point on that pad's centre or on a via)
N$1
  Top 0.61: VBAT9V+.1 116.48,87.44 S1.2
N$2
  Top 0.61: S1.1 118.52,79.57 R1.1
  Bottom 0.61: R1.1 114.3,75.35 114.3,65.13 114.68,64.74 115.4,64.74 | 115.4,64.74 IC1.8 | IC1.4 122.24,59.83 116,59.83 115,60.83 115,64.34 115.4,64.74
N$3
  Top 0.61: C1.- 124.2,69.25 124.2,72.43 120.81,75.82 T1.E 120.81,87.49 VBAT9V-.1 129.1,88.46 129.1,59.03 124.93,54.86 INPIN2.1
  Bottom 0.61: C1.- 124.1,65.5 IC1.1
N$4
  Top 0.61: JUMP1-1.1 121.56,71.47 C1.+
  Bottom 0.61: C1.+ 120.6,68.19 120.6,63.23 | 120.6,63.23 120.6,62.83 119.97,62.21 IC1.6 | IC1.2 120.84,63.48 120.6,63.23
N$5
  Top 0.61: R2.1 117.1,69.58 JUMP1-2.1
N$6
  Top 0.61: R1.2 116.83,73.09 R2.2
  Bottom 0.61: R2.2 119.4,69.82 119.4,64.23 118.64,63.48 IC1.7
N$7
  Bottom 0.61: T1.B 125.8,74.37 125.8,63.23 124.77,62.21 IC1.3
N$8
  Top 0.61: S1.4 125.89,80.57 T1.C
N$9
  Top 0.61: VBAT9V+1.1 144.18,87.44 S2.2
N$10
  Top 0.61: INPIN1.1 120.08,57.63 125.4,57.63 127.5,59.73 127.5,83.33 125.43,85.4 S1.5
N$11
  Top 0.61: S2.1 146.22,79.57 R3.1
  Bottom 0.61: R3.1 142,75.35 142,65.13 142.38,64.74 143.1,64.74 | 143.1,64.74 IC2.8 | IC2.4 149.94,59.83 143.7,59.83 142.7,60.83 142.7,64.34 143.1,64.74
N$12
  Top 0.61: C2.- 151.9,69.25 151.9,72.43 148.51,75.82 T2.E 148.51,87.49 VBAT9V-1.1 156.8,88.46 156.8,59.03 152.63,54.86 INPIN4.1
  Bottom 0.61: C2.- 151.8,65.5 IC2.1
N$13
  Top 0.61: JUMP1-4.1 149.26,71.47 C2.+
  Bottom 0.61: C2.+ 148.3,68.19 148.3,63.23 | 148.3,63.23 148.3,62.83 147.67,62.21 IC2.6 | IC2.2 148.54,63.48 148.3,63.23
N$14
  Top 0.61: R3.2 144.53,73.09 R4.2
  Bottom 0.61: R4.2 147.1,69.82 147.1,64.23 146.34,63.48 IC2.7
N$15
  Bottom 0.61: T2.B 153.5,74.37 153.5,63.23 152.47,62.21 IC2.3
N$16
  Top 0.61: S2.4 153.59,80.57 T2.C
N$17
  Top 0.61: INPIN3.1 147.78,57.63 153.1,57.63 155.2,59.73 155.2,83.33 153.13,85.4 S2.5
N$18
  Top 0.61: R4.1 144.8,69.58 JUMP1-3.1
N$19
  Top 0.61: VBAT9V+2.1 61.78,87.44 S3.2
N$20
  Top 0.61: S3.1 63.82,79.57 R5.1
  Bottom 0.61: R5.1 59.6,75.35 59.6,65.13 59.98,64.74 60.7,64.74 | 60.7,64.74 IC3.8 | IC3.4 67.54,59.83 61.3,59.83 60.3,60.83 60.3,64.34 60.7,64.74
N$21
  Top 0.61: C3.- 69.5,69.25 69.5,72.43 66.11,75.82 T3.E 66.11,87.49 VBAT9V-2.1 74.4,88.46 74.4,59.03 70.23,54.86 INPIN6.1
  Bottom 0.61: C3.- 69.4,65.5 IC3.1
N$22
  Top 0.61: JUMP1-6.1 66.86,71.47 C3.+
  Bottom 0.61: C3.+ 65.9,68.19 65.9,63.23 | 65.9,63.23 65.9,62.83 65.27,62.21 IC3.6 | IC3.2 66.14,63.48 65.9,63.23
N$23
  Top 0.61: R5.2 62.13,73.09 R6.2
  Bottom 0.61: R6.2 64.7,69.82 64.7,64.23 63.95,63.48 IC3.7
N$24
  Bottom 0.61: T3.B 71.1,74.37 71.1,63.23 70.07,62.21 IC3.3
N$25
  Top 0.61: S3.4 71.19,80.57 T3.C
N$26
  Top 0.61: INPIN5.1 65.38,57.63 70.7,57.63 72.8,59.73 72.8,83.33 70.73,85.4 S3.5
N$27
  Top 0.61: R6.1 62.4,69.58 JUMP1-5.1
N$28
  Top 0.61: VBAT9V+3.1 89.48,87.44 S4.2
N$29
  Top 0.61: S4.1 91.52,79.57 R7.1
  Bottom 0.61: R7.1 87.3,75.35 87.3,65.13 87.68,64.74 88.4,64.74 | 88.4,64.74 IC4.8 | IC4.4 95.24,59.83 89,59.83 88,60.83 88,64.34 88.4,64.74
N$30
  Top 0.61: C4.- 97.2,69.25 97.2,72.43 93.81,75.82 T4.E 93.81,87.49 VBAT9V-3.1 102.1,88.46 102.1,59.03 97.93,54.86 INPIN8.1
  Bottom 0.61: C4.- 97.1,65.5 IC4.1
N$31
  Top 0.61: JUMP1-8.1 94.56,71.47 C4.+
  Bottom 0.61: C4.+ 93.6,68.19 93.6,63.23 | 93.6,63.23 93.6,62.83 92.97,62.21 IC4.6 | IC4.2 93.84,63.48 93.6,63.23
N$32
  Top 0.61: R7.2 89.83,73.09 R8.2
  Bottom 0.61: R8.2 92.4,69.82 92.4,64.23 91.64,63.48 IC4.7
N$33
  Bottom 0.61: T4.B 98.8,74.37 98.8,63.23 97.77,62.21 IC4.3
N$34
  Top 0.61: S4.4 98.89,80.57 T4.C
N$35
  Top 0.61: INPIN7.1 93.08,57.63 98.4,57.63 100.5,59.73 100.5,83.33 98.43,85.4 S4.5
N$36
  Top 0.61: R8.1 90.1,69.58 JUMP1-7.1
N$37
  Top 0.61: VBAT9V+4.1 6.28,87.64 S5.2
N$38
  Top 0.61: S5.1 8.32,79.77 R9.1
  Bottom 0.61: R9.1 4.1,75.55 4.1,65.33 4.48,64.94 5.2,64.94 | 5.2,64.94 IC5.8 | IC5.4 12.04,60.03 5.8,60.03 4.8,61.03 4.8,64.55 5.2,64.94
N$39
  Top 0.61: C5.- 14,69.45 14,72.63 10.61,76.02 T5.E 10.61,87.69 VBAT9V-4.1 18.9,88.66 18.9,59.23 14.73,55.06 INPIN10.1
  Bottom 0.61: C5.- 13.9,65.7 IC5.1
N$40
  Top 0.61: JUMP1-10.1 11.36,71.67 C5.+
  Bottom 0.61: C5.+ 10.4,68.39 10.4,63.43 | 10.4,63.43 10.4,63.03 9.78,62.41 IC5.6 | IC5.2 10.64,63.68 10.4,63.43
N$41
  Top 0.61: R9.2 6.63,73.29 R10.2
  Bottom 0.61: R10.2 9.2,70.02 9.2,64.43 8.45,63.68 IC5.7
N$42
  Bottom 0.61: T5.B 15.6,74.57 15.6,63.43 14.57,62.41 IC5.3
N$43
  Top 0.61: S5.4 15.69,80.77 T5.C
N$44
  Top 0.61: INPIN9.1 9.88,57.83 15.2,57.83 17.3,59.93 17.3,83.53 15.23,85.6 S5.5
N$45
  Top 0.61: R10.1 6.9,69.78 JUMP1-9.1
N$46
  Top 0.61: VBAT9V+5.1 33.98,87.64 S6.2
N$47
  Top 0.61: S6.1 36.02,79.77 R11.1
  Bottom 0.61: R11.1 31.8,75.55 31.8,65.33 32.19,64.94 32.9,64.94 | 32.9,64.94 IC6.8 | IC6.4 39.74,60.03 33.5,60.03 32.5,61.03 32.5,64.55 32.9,64.94
N$48
  Top 0.61: C6.- 41.7,69.45 41.7,72.63 38.31,76.02 T6.E 38.31,87.69 VBAT9V-5.1 46.6,88.66 46.6,59.23 42.43,55.06 INPIN12.1
  Bottom 0.61: C6.- 41.6,65.7 IC6.1
N$49
  Top 0.61: JUMP1-12.1 39.06,71.67 C6.+
  Bottom 0.61: C6.+ 38.1,68.39 38.1,63.43 | 38.1,63.43 38.1,63.03 37.48,62.41 IC6.6 | IC6.2 38.34,63.68 38.1,63.43
N$50
  Top 0.61: R11.2 34.33,73.29 R12.2
  Bottom 0.61: R12.2 36.9,70.02 36.9,64.43 36.15,63.68 IC6.7
N$51
  Bottom 0.61: T6.B 43.3,74.57 43.3,63.43 42.27,62.41 IC6.3
N$52
  Top 0.61: S6.4 43.39,80.77 T6.C
N$53
  Top 0.61: INPIN11.1 37.58,57.83 42.9,57.83 45,59.93 45,83.53 42.93,85.6 S6.5
N$54
  Top 0.61: R12.1 34.6,69.78 JUMP1-11.1
N$55
  Top 0.61: VBAT9V+6.1 116.18,36.04 S7.2
N$56
  Top 0.61: S7.1 118.22,28.17 R13.1
  Bottom 0.61: R13.1 114,23.95 114,13.73 114.38,13.35 115.1,13.35 | 115.1,13.35 IC7.8 | IC7.4 121.94,8.43 115.7,8.43 114.7,9.43 114.7,12.95 115.1,13.35
N$57
  Top 0.61: C7.- 123.9,17.85 123.9,21.03 120.51,24.42 T7.E 120.51,36.09 VBAT9V-6.1 128.8,37.06 128.8,7.63 124.63,3.46 INPIN14.1
  Bottom 0.61: C7.- 123.8,14.1 IC7.1
N$58
  Top 0.61: JUMP1-14.1 121.26,20.07 C7.+
  Bottom 0.61: C7.+ 120.3,16.79 120.3,11.83 | 120.3,11.83 120.3,11.43 119.67,10.81 IC7.6 | IC7.2 120.54,12.08 120.3,11.83
N$59
  Top 0.61: R13.2 116.53,21.69 R14.2
  Bottom 0.61: R14.2 119.1,18.42 119.1,12.83 118.34,12.08 IC7.7
N$60
  Bottom 0.61: T7.B 125.5,22.97 125.5,11.83 124.47,10.81 IC7.3
N$61
  Top 0.61: S7.4 125.59,29.17 T7.C
N$62
  Top 0.61: INPIN13.1 119.78,6.23 125.1,6.23 127.2,8.33 127.2,31.93 125.13,34 S7.5
N$63
  Top 0.61: R14.1 116.8,18.18 JUMP1-13.1
N$64
  Top 0.61: VBAT9V+7.1 143.88,36.04 S8.2
N$65
  Top 0.61: S8.1 145.92,28.17 R15.1
  Bottom 0.61: R15.1 141.7,23.95 141.7,13.73 142.09,13.35 142.8,13.35 | 142.8,13.35 IC8.8 | IC8.4 149.64,8.43 143.4,8.43 142.4,9.43 142.4,12.95 142.8,13.35
N$66
  Top 0.61: C8.- 151.6,17.85 151.6,21.03 148.21,24.42 T8.E 148.21,36.09 VBAT9V-7.1 156.5,37.06 156.5,7.63 152.33,3.46 INPIN16.1
  Bottom 0.61: C8.- 151.5,14.1 IC8.1
N$67
  Top 0.61: JUMP1-16.1 148.96,20.07 C8.+
  Bottom 0.61: C8.+ 148,16.79 148,11.83 | 148,11.83 148,11.43 147.38,10.81 IC8.6 | IC8.2 148.25,12.08 148,11.83
N$68
  Top 0.61: R15.2 144.23,21.69 R16.2
  Bottom 0.61: R16.2 146.8,18.42 146.8,12.83 146.04,12.08 IC8.7
N$69
  Bottom 0.61: T8.B 153.2,22.97 153.2,11.83 152.17,10.81 IC8.3
N$70
  Top 0.61: S8.4 153.29,29.17 T8.C
N$71
  Top 0.61: INPIN15.1 147.48,6.23 152.8,6.23 154.9,8.33 154.9,31.93 152.83,34 S8.5
N$72
  Top 0.61: R16.1 144.5,18.18 JUMP1-15.1
N$73
  Top 0.61: VBAT9V+8.1 61.48,36.04 S9.2
N$74
  Top 0.61: S9.1 63.52,28.17 R17.1
  Bottom 0.61: R17.1 59.3,23.95 59.3,13.73 59.69,13.35 60.4,13.35 | 60.4,13.35 IC9.8 | IC9.4 67.24,8.43 61,8.43 60,9.43 60,12.95 60.4,13.35
N$75
  Top 0.61: C9.- 69.2,17.85 69.2,21.03 65.81,24.42 T9.E 65.81,36.09 VBAT9V-8.1 74.1,37.06 74.1,7.63 69.93,3.46 INPIN18.1
  Bottom 0.61: C9.- 69.1,14.1 IC9.1
N$76
  Top 0.61: JUMP1-18.1 66.56,20.07 C9.+
  Bottom 0.61: C9.+ 65.6,16.79 65.6,11.83 | 65.6,11.83 65.6,11.43 64.97,10.81 IC9.6 | IC9.2 65.84,12.08 65.6,11.83
N$77
  Top 0.61: R17.2 61.83,21.69 R18.2
  Bottom 0.61: R18.2 64.4,18.42 64.4,12.83 63.65,12.08 IC9.7
N$78
  Bottom 0.61: T9.B 70.8,22.97 70.8,11.83 69.77,10.81 IC9.3
N$79
  Top 0.61: S9.4 70.89,29.17 T9.C
N$80
  Top 0.61: INPIN17.1 65.08,6.23 70.4,6.23 72.5,8.33 72.5,31.93 70.43,34 S9.5
N$81
  Top 0.61: R18.1 62.1,18.18 JUMP1-17.1
N$82
  Top 0.61: VBAT9V+9.1 89.18,36.04 S10.2
N$83
  Top 0.61: S10.1 91.22,28.17 R19.1
  Bottom 0.61: R19.1 87,23.95 87,13.73 87.38,13.35 88.1,13.35 | 88.1,13.35 IC10.8 | IC10.4 94.94,8.43 88.7,8.43 87.7,9.43 87.7,12.95 88.1,13.35
N$84
  Top 0.61: C10.- 96.9,17.85 96.9,21.03 93.51,24.42 T10.E 93.51,36.09 VBAT9V-9.1 101.8,37.06 101.8,7.63 97.63,3.46 INPIN20.1
  Bottom 0.61: C10.- 96.8,14.1 IC10.1
N$85
  Top 0.61: JUMP1-20.1 94.26,20.07 C10.+
  Bottom 0.61: C10.+ 93.3,16.79 93.3,11.83 | 93.3,11.83 93.3,11.43 92.67,10.81 IC10.6 | IC10.2 93.54,12.08 93.3,11.83
N$86
  Top 0.61: R19.2 89.53,21.69 R20.2
  Bottom 0.61: R20.2 92.1,18.42 92.1,12.83 91.34,12.08 IC10.7
N$87
  Bottom 0.61: T10.B 98.5,22.97 98.5,11.83 97.47,10.81 IC10.3
N$88
  Top 0.61: S10.4 98.59,29.17 T10.C
N$89
  Top 0.61: INPIN19.1 92.78,6.23 98.1,6.23 100.2,8.33 100.2,31.93 98.13,34 S10.5
N$90
  Top 0.61: R20.1 89.8,18.18 JUMP1-19.1
N$91
  Top 0.61: VBAT9V+10.1 5.98,36.24 S11.2
N$92
  Top 0.61: S11.1 8.02,28.37 R21.1
  Bottom 0.61: R21.1 3.8,24.15 3.8,13.93 4.18,13.54 4.9,13.54 | 4.9,13.54 IC11.8 | IC11.4 11.74,8.63 5.5,8.63 4.5,9.63 4.5,13.15 4.9,13.54
N$93
  Top 0.61: C11.- 13.7,18.05 13.7,21.23 10.31,24.62 T11.E 10.31,36.29 VBAT9V-10.1 18.6,37.26 18.6,7.83 14.43,3.66 INPIN22.1
  Bottom 0.61: C11.- 13.6,14.3 IC11.1
N$94
  Top 0.61: JUMP1-22.1 11.06,20.27 C11.+
  Bottom 0.61: C11.+ 10.1,16.99 10.1,12.03 | 10.1,12.03 10.1,11.63 9.47,11.01 IC11.6 | IC11.2 10.34,12.28 10.1,12.03
N$95
  Top 0.61: R21.2 6.33,21.89 R22.2
  Bottom 0.61: R22.2 8.9,18.62 8.9,13.03 8.14,12.28 IC11.7
N$96
  Bottom 0.61: T11.B 15.3,23.17 15.3,12.03 14.28,11.01 IC11.3
N$97
  Top 0.61: S11.4 15.39,29.37 T11.C
N$98
  Top 0.61: INPIN21.1 9.58,6.43 14.9,6.43 17,8.53 17,32.13 14.93,34.2 S11.5
N$99
  Top 0.61: R22.1 6.6,18.38 JUMP1-21.1
N$100
  Top 0.61: VBAT9V+11.1 33.68,36.24 S12.2
N$101
  Top 0.61: S12.1 35.72,28.37 R23.1
  Bottom 0.61: R23.1 31.5,24.15 31.5,13.93 31.89,13.54 32.6,13.54 | 32.6,13.54 IC12.8 | IC12.4 39.44,8.63 33.2,8.63 32.2,9.63 32.2,13.15 32.6,13.54
N$102
  Top 0.61: C12.- 41.4,18.05 41.4,21.23 38.01,24.62 T12.E 38.01,36.29 VBAT9V-11.1 46.3,37.26 46.3,7.83 42.13,3.66 INPIN24.1
  Bottom 0.61: C12.- 41.3,14.3 IC12.1
N$103
  Top 0.61: JUMP1-24.1 38.76,20.27 C12.+
  Bottom 0.61: C12.+ 37.8,16.99 37.8,12.03 | 37.8,12.03 37.8,11.63 37.18,11.01 IC12.6 | IC12.2 38.05,12.28 37.8,12.03
N$104
  Top 0.61: R23.2 34.03,21.89 R24.2
  Bottom 0.61: R24.2 36.6,18.62 36.6,13.03 35.84,12.28 IC12.7
N$105
  Bottom 0.61: T12.B 43,23.17 43,12.03 41.98,11.01 IC12.3
N$106
  Top 0.61: S12.4 43.09,29.37 T12.C
N$107
  Top 0.61: INPIN23.1 37.28,6.43 42.6,6.43 44.7,8.53 44.7,32.13 42.63,34.2 S12.5
N$108
  Top 0.61: R24.1 34.3,18.38 JUMP1-23.1
N$109
  Top 0.61: VBAT9V+12.1 116.98,192.84 S13.2
N$110
  Top 0.61: S13.1 119.02,184.97 R25.1
  Bottom 0.61: R25.1 114.8,180.75 114.8,170.53 115.18,170.14 115.9,170.14 | 115.9,170.14 IC13.8 | IC13.4 122.74,165.23 116.5,165.23 115.5,166.23 115.5,169.75 115.9,170.14
N$111
  Top 0.61: C13.- 124.7,174.65 124.7,177.83 121.31,181.22 T13.E 121.31,192.89 VBAT9V-12.1 129.6,193.86 129.6,164.43 125.43,160.26 INPIN26.1
  Bottom 0.61: C13.- 124.6,170.9 IC13.1
N$112
  Top 0.61: JUMP1-26.1 122.06,176.87 C13.+
  Bottom 0.61: C13.+ 121.1,173.59 121.1,168.63 | 121.1,168.63 121.1,168.23 120.47,167.6 IC13.6 | IC13.2 121.34,168.88 121.1,168.63
N$113
  Top 0.61: R25.2 117.33,178.49 R26.2
  Bottom 0.61: R26.2 119.9,175.22 119.9,169.63 119.14,168.88 IC13.7
N$114
  Bottom 0.61: T13.B 126.3,179.77 126.3,168.63 125.27,167.6 IC13.3
N$115
  Top 0.61: S13.4 126.39,185.97 T13.C
N$116
  Top 0.61: INPIN25.1 120.58,163.03 125.9,163.03 128,165.13 128,188.73 125.93,190.8 S13.5
N$117
  Top 0.61: R26.1 117.6,174.98 JUMP1-25.1
N$118
  Top 0.61: VBAT9V+13.1 144.68,192.84 S14.2
N$119
  Top 0.61: S14.1 146.72,184.97 R27.1
  Bottom 0.61: R27.1 142.5,180.75 142.5,170.53 142.88,170.14 143.6,170.14 | 143.6,170.14 IC14.8 | IC14.4 150.44,165.23 144.2,165.23 143.2,166.23 143.2,169.75 143.6,170.14
N$120
  Top 0.61: C14.- 152.4,174.65 152.4,177.83 149.01,181.22 T14.E 149.01,192.89 VBAT9V-13.1 157.3,193.86 157.3,164.43 153.13,160.26 INPIN28.1
  Bottom 0.61: C14.- 152.3,170.9 IC14.1
N$121
  Top 0.61: JUMP1-28.1 149.76,176.87 C14.+
  Bottom 0.61: C14.+ 148.8,173.59 148.8,168.63 | 148.8,168.63 148.8,168.23 148.17,167.6 IC14.6 | IC14.2 149.04,168.88 148.8,168.63
N$122
  Top 0.61: R27.2 145.03,178.49 R28.2
  Bottom 0.61: R28.2 147.6,175.22 147.6,169.63 146.84,168.88 IC14.7
N$123
  Bottom 0.61: T14.B 154,179.77 154,168.63 152.97,167.6 IC14.3
N$124
  Top 0.61: S14.4 154.09,185.97 T14.C
N$125
  Top 0.61: INPIN27.1 148.28,163.03 153.6,163.03 155.7,165.13 155.7,188.73 153.63,190.8 S14.5
N$126
  Top 0.61: R28.1 145.3,174.98 JUMP1-27.1
N$127
  Top 0.61: VBAT9V+14.1 62.28,192.84 S15.2
N$128
  Top 0.61: S15.1 64.32,184.97 R29.1
  Bottom 0.61: R29.1 60.1,180.75 60.1,170.53 60.48,170.14 61.2,170.14 | 61.2,170.14 IC15.8 | IC15.4 68.04,165.23 61.8,165.23 60.8,166.23 60.8,169.75 61.2,170.14
N$129
  Top 0.61: C15.- 70,174.65 70,177.83 66.61,181.22 T15.E 66.61,192.89 VBAT9V-14.1 74.9,193.86 74.9,164.43 70.73,160.26 INPIN30.1
  Bottom 0.61: C15.- 69.9,170.9 IC15.1
N$130
  Top 0.61: JUMP1-30.1 67.36,176.87 C15.+
  Bottom 0.61: C15.+ 66.4,173.59 66.4,168.63 | 66.4,168.63 66.4,168.23 65.77,167.6 IC15.6 | IC15.2 66.64,168.88 66.4,168.63
N$131
  Top 0.61: R29.2 62.63,178.49 R30.2
  Bottom 0.61: R30.2 65.2,175.22 65.2,169.63 64.44,168.88 IC15.7
N$132
  Bottom 0.61: T15.B 71.6,179.77 71.6,168.63 70.57,167.6 IC15.3
N$133
  Top 0.61: S15.4 71.69,185.97 T15.C
N$134
  Top 0.61: INPIN29.1 65.88,163.03 71.2,163.03 73.3,165.13 73.3,188.73 71.23,190.8 S15.5
N$135
  Top 0.61: R30.1 62.9,174.98 JUMP1-29.1
N$136
  Top 0.61: VBAT9V+15.1 89.98,192.84 S16.2
N$137
  Top 0.61: S16.1 92.02,184.97 R31.1
  Bottom 0.61: R31.1 87.8,180.75 87.8,170.53 88.18,170.14 88.9,170.14 | 88.9,170.14 IC16.8 | IC16.4 95.74,165.23 89.5,165.23 88.5,166.23 88.5,169.75 88.9,170.14
N$138
  Top 0.61: C16.- 97.7,174.65 97.7,177.83 94.31,181.22 T16.E 94.31,192.89 VBAT9V-15.1 102.6,193.86 102.6,164.43 98.43,160.26 INPIN32.1
  Bottom 0.61: C16.- 97.6,170.9 IC16.1
N$139
  Top 0.61: JUMP1-32.1 95.06,176.87 C16.+
  Bottom 0.61: C16.+ 94.1,173.59 94.1,168.63 | 94.1,168.63 94.1,168.23 93.47,167.6 IC16.6 | IC16.2 94.34,168.88 94.1,168.63
N$140
  Top 0.61: R31.2 90.33,178.49 R32.2
  Bottom 0.61: R32.2 92.9,175.22 92.9,169.63 92.14,168.88 IC16.7
N$141
  Bottom 0.61: T16.B 99.3,179.77 99.3,168.63 98.27,167.6 IC16.3
N$142
  Top 0.61: S16.4 99.39,185.97 T16.C
N$143
  Top 0.61: INPIN31.1 93.58,163.03 98.9,163.03 101,165.13 101,188.73 98.93,190.8 S16.5
N$144
  Top 0.61: R32.1 90.6,174.98 JUMP1-31.1
N$145
  Top 0.61: VBAT9V+16.1 6.78,193.04 S17.2
N$146
  Top 0.61: S17.1 8.82,185.17 R33.1
  Bottom 0.61: R33.1 4.6,180.95 4.6,170.73 4.98,170.34 5.7,170.34 | 5.7,170.34 IC17.8 | IC17.4 12.54,165.43 6.3,165.43 5.3,166.43 5.3,169.94 5.7,170.34
N$147
  Top 0.61: C17.- 14.5,174.85 14.5,178.03 11.11,181.42 T17.E 11.11,193.09 VBAT9V-16.1 19.4,194.06 19.4,164.63 15.23,160.46 INPIN34.1
  Bottom 0.61: C17.- 14.4,171.1 IC17.1
N$148
  Top 0.61: JUMP1-34.1 11.86,177.07 C17.+
  Bottom 0.61: C17.+ 10.9,173.79 10.9,168.83 | 10.9,168.83 10.9,168.43 10.28,167.81 IC17.6 | IC17.2 11.14,169.07 10.9,168.83
N$149
  Top 0.61: R33.2 7.13,178.69 R34.2
  Bottom 0.61: R34.2 9.7,175.42 9.7,169.83 8.95,169.07 IC17.7
N$150
  Bottom 0.61: T17.B 16.1,179.97 16.1,168.83 15.07,167.81 IC17.3
N$151
  Top 0.61: S17.4 16.19,186.17 T17.C
N$152
  Top 0.61: INPIN33.1 10.38,163.23 15.7,163.23 17.8,165.33 17.8,188.93 15.73,191 S17.5
N$153
  Top 0.61: R34.1 7.4,175.18 JUMP1-33.1
N$154
  Top 0.61: VBAT9V+17.1 34.48,193.04 S18.2
N$155
  Top 0.61: S18.1 36.52,185.17 R35.1
  Bottom 0.61: R35.1 32.3,180.95 32.3,170.73 32.69,170.34 33.4,170.34 | 33.4,170.34 IC18.8 | IC18.4 40.24,165.43 34,165.43 33,166.43 33,169.94 33.4,170.34
N$156
  Top 0.61: C18.- 42.2,174.85 42.2,178.03 38.81,181.42 T18.E 38.81,193.09 VBAT9V-17.1 47.1,194.06 47.1,164.63 42.93,160.46 INPIN36.1
  Bottom 0.61: C18.- 42.1,171.1 IC18.1
N$157
  Top 0.61: JUMP1-36.1 39.56,177.07 C18.+
  Bottom 0.61: C18.+ 38.6,173.79 38.6,168.83 | 38.6,168.83 38.6,168.43 37.98,167.81 IC18.6 | IC18.2 38.84,169.07 38.6,168.83
N$158
  Top 0.61: R35.2 34.83,178.69 R36.2
  Bottom 0.61: R36.2 37.4,175.42 37.4,169.83 36.65,169.07 IC18.7
N$159
  Bottom 0.61: T18.B 43.8,179.97 43.8,168.83 42.77,167.81 IC18.3
N$160
  Top 0.61: S18.4 43.89,186.17 T18.C
N$161
  Top 0.61: INPIN35.1 38.08,163.23 43.4,163.23 45.5,165.33 45.5,188.93 43.43,191 S18.5
N$162
  Top 0.61: R36.1 35.1,175.18 JUMP1-35.1
N$163
  Top 0.61: VBAT9V+18.1 116.68,141.44 S19.2
N$164
  Top 0.61: S19.1 118.72,133.57 R37.1
  Bottom 0.61: R37.1 114.5,129.35 114.5,119.13 114.88,118.74 115.6,118.74 | 115.6,118.74 IC19.8 | IC19.4 122.44,113.83 116.2,113.83 115.2,114.83 115.2,118.34 115.6,118.74
N$165
  Top 0.61: C19.- 124.4,123.25 124.4,126.43 121.01,129.82 T19.E 121.01,141.49 VBAT9V-18.1 129.3,142.46 129.3,113.03 125.13,108.86 INPIN38.1
  Bottom 0.61: C19.- 124.3,119.5 IC19.1
N$166
  Top 0.61: JUMP1-38.1 121.76,125.47 C19.+
  Bottom 0.61: C19.+ 120.8,122.19 120.8,117.23 | 120.8,117.23 120.8,116.83 120.17,116.2 IC19.6 | IC19.2 121.04,117.47 120.8,117.23
N$167
  Top 0.61: R37.2 117.03,127.09 R38.2
  Bottom 0.61: R38.2 119.6,123.82 119.6,118.23 118.84,117.47 IC19.7
N$168
  Bottom 0.61: T19.B 126,128.37 126,117.23 124.97,116.2 IC19.3
N$169
  Top 0.61: S19.4 126.09,134.57 T19.C
N$170
  Top 0.61: INPIN37.1 120.28,111.63 125.6,111.63 127.7,113.73 127.7,137.33 125.63,139.4 S19.5
N$171
  Top 0.61: R38.1 117.3,123.58 JUMP1-37.1
N$172
  Top 0.61: VBAT9V+19.1 144.38,141.44 S20.2
N$173
  Top 0.61: S20.1 146.42,133.57 R39.1
  Bottom 0.61: R39.1 142.2,129.35 142.2,119.13 142.59,118.74 143.3,118.74 | 143.3,118.74 IC20.8 | IC20.4 150.14,113.83 143.9,113.83 142.9,114.83 142.9,118.34 143.3,118.74
N$174
  Top 0.61: C20.- 152.1,123.25 152.1,126.43 148.71,129.82 T20.E 148.71,141.49 VBAT9V-19.1 157,142.46 157,113.03 152.83,108.86 INPIN40.1
  Bottom 0.61: C20.- 152,119.5 IC20.1
N$175
  Top 0.61: JUMP1-40.1 149.46,125.47 C20.+
  Bottom 0.61: C20.+ 148.5,122.19 148.5,117.23 | 148.5,117.23 148.5,116.83 147.88,116.2 IC20.6 | IC20.2 148.75,117.47 148.5,117.23
N$176
  Top 0.61: R39.2 144.73,127.09 R40.2
  Bottom 0.61: R40.2 147.3,123.82 147.3,118.23 146.54,117.47 IC20.7
N$177
  Bottom 0.61: T20.B 153.7,128.37 153.7,117.23 152.67,116.2 IC20.3
N$178
  Top 0.61: S20.4 153.79,134.57 T20.C
N$179
  Top 0.61: INPIN39.1 147.98,111.63 153.3,111.63 155.4,113.73 155.4,137.33 153.33,139.4 S20.5
N$180
  Top 0.61: R40.1 145,123.58 JUMP1-39.1
N$181
  Top 0.61: VBAT9V+20.1 61.98,141.44 S21.2
N$182
  Top 0.61: S21.1 64.02,133.57 R41.1
  Bottom 0.61: R41.1 59.8,129.35 59.8,119.13 60.19,118.74 60.9,118.74 | 60.9,118.74 IC21.8 | IC21.4 67.74,113.83 61.5,113.83 60.5,114.83 60.5,118.34 60.9,118.74
N$183
  Top 0.61: C21.- 69.7,123.25 69.7,126.43 66.31,129.82 T21.E 66.31,141.49 VBAT9V-20.1 74.6,142.46 74.6,113.03 70.43,108.86 INPIN42.1
  Bottom 0.61: C21.- 69.6,119.5 IC21.1
N$184
  Top 0.61: JUMP1-42.1 67.06,125.47 C21.+
  Bottom 0.61: C21.+ 66.1,122.19 66.1,117.23 | 66.1,117.23 66.1,116.83 65.47,116.2 IC21.6 | IC21.2 66.34,117.47 66.1,117.23
N$185
  Top 0.61: R41.2 62.33,127.09 R42.2
  Bottom 0.61: R42.2 64.9,123.82 64.9,118.23 64.14,117.47 IC21.7
N$186
  Bottom 0.61: T21.B 71.3,128.37 71.3,117.23 70.27,116.2 IC21.3
N$187
  Top 0.61: S21.4 71.39,134.57 T21.C
N$188
  Top 0.61: INPIN41.1 65.58,111.63 70.9,111.63 73,113.73 73,137.33 70.93,139.4 S21.5
N$189
  Top 0.61: R42.1 62.6,123.58 JUMP1-41.1
N$190
  Top 0.61: VBAT9V+21.1 89.68,141.44 S22.2
N$191
  Top 0.61: S22.1 91.72,133.57 R43.1
  Bottom 0.61: R43.1 87.5,129.35 87.5,119.13 87.88,118.74 88.6,118.74 | 88.6,118.74 IC22.8 | IC22.4 95.44,113.83 89.2,113.83 88.2,114.83 88.2,118.34 88.6,118.74
N$192
  Top 0.61: C22.- 97.4,123.25 97.4,126.43 94.01,129.82 T22.E 94.01,141.49 VBAT9V-21.1 102.3,142.46 102.3,113.03 98.13,108.86 INPIN44.1
  Bottom 0.61: C22.- 97.3,119.5 IC22.1
N$193
  Top 0.61: JUMP1-44.1 94.76,125.47 C22.+
  Bottom 0.61: C22.+ 93.8,122.19 93.8,117.23 | 93.8,117.23 93.8,116.83 93.17,116.2 IC22.6 | IC22.2 94.04,117.47 93.8,117.23
N$194
  Top 0.61: R43.2 90.03,127.09 R44.2
  Bottom 0.61: R44.2 92.6,123.82 92.6,118.23 91.84,117.47 IC22.7
N$195
  Bottom 0.61: T22.B 99,128.37 99,117.23 97.97,116.2 IC22.3
N$196
  Top 0.61: S22.4 99.09,134.57 T22.C
N$197
  Top 0.61: INPIN43.1 93.28,111.63 98.6,111.63 100.7,113.73 100.7,137.33 98.63,139.4 S22.5
N$198
  Top 0.61: R44.1 90.3,123.58 JUMP1-43.1
N$199
  Top 0.61: VBAT9V+22.1 6.48,141.64 S23.2
N$200
  Top 0.61: S23.1 8.52,133.77 R45.1
  Bottom 0.61: R45.1 4.3,129.55 4.3,119.33 4.68,118.94 5.4,118.94 | 5.4,118.94 IC23.8 | IC23.4 12.24,114.03 6,114.03 5,115.03 5,118.55 5.4,118.94
N$201
  Top 0.61: C23.- 14.2,123.45 14.2,126.63 10.81,130.02 T23.E 10.81,141.69 VBAT9V-22.1 19.1,142.66 19.1,113.23 14.93,109.06 INPIN46.1
  Bottom 0.61: C23.- 14.1,119.7 IC23.1
N$202
  Top 0.61: JUMP1-46.1 11.56,125.67 C23.+
  Bottom 0.61: C23.+ 10.6,122.39 10.6,117.43 | 10.6,117.43 10.6,117.03 9.97,116.41 IC23.6 | IC23.2 10.84,117.67 10.6,117.43
N$203
  Top 0.61: R45.2 6.83,127.29 R46.2
  Bottom 0.61: R46.2 9.4,124.02 9.4,118.43 8.64,117.67 IC23.7
N$204
  Bottom 0.61: T23.B 15.8,128.57 15.8,117.43 14.78,116.41 IC23.3
N$205
  Top 0.61: S23.4 15.89,134.77 T23.C
N$206
  Top 0.61: INPIN45.1 10.08,111.83 15.4,111.83 17.5,113.93 17.5,137.53 15.43,139.6 S23.5
N$207
  Top 0.61: R46.1 7.1,123.78 JUMP1-45.1
N$208
  Top 0.61: VBAT9V+23.1 34.18,141.64 S24.2
N$209
  Top 0.61: S24.1 36.22,133.77 R47.1
  Bottom 0.61: R47.1 32,129.55 32,119.33 32.38,118.94 33.1,118.94 | 33.1,118.94 IC24.8 | IC24.4 39.94,114.03 33.7,114.03 32.7,115.03 32.7,118.55 33.1,118.94
N$210
  Top 0.61: C24.- 41.9,123.45 41.9,126.63 38.51,130.02 T24.E 38.51,141.69 VBAT9V-23.1 46.8,142.66 46.8,113.23 42.63,109.06 INPIN48.1
  Bottom 0.61: C24.- 41.8,119.7 IC24.1
N$211
  Top 0.61: JUMP1-48.1 39.26,125.67 C24.+
  Bottom 0.61: C24.+ 38.3,122.39 38.3,117.43 | 38.3,117.43 38.3,117.03 37.68,116.41 IC24.6 | IC24.2 38.55,117.67 38.3,117.43
N$212
  Top 0.61: R47.2 34.53,127.29 R48.2
  Bottom 0.61: R48.2 37.1,124.02 37.1,118.43 36.34,117.67 IC24.7
N$213
  Bottom 0.61: T24.B 43.5,128.57 43.5,117.43 42.48,116.41 IC24.3
N$214
  Top 0.61: S24.4 43.59,134.77 T24.C
N$215
  Top 0.61: INPIN47.1 37.78,111.83 43.1,111.83 45.2,113.93 45.2,137.53 43.13,139.6 S24.5
N$216
  Top 0.61: R48.1 34.8,123.78 JUMP1-47.1

## Text on the board
Top: CMEnet.ro | CMEnet.ro | CMEnet.ro | CMEnet.ro | CMEnet.ro | CMEnet.ro | rev1 | rev1 | rev1 | rev1 | rev1 | rev1 | CMEnet.ro | CMEnet.ro | CMEnet.ro | CMEnet.ro | CMEnet.ro | CMEnet.ro | rev1 | rev1 | rev1 | rev1 | rev1 | rev1 | CMEnet.ro | CMEnet.ro | CMEnet.ro | CMEnet.ro | CMEnet.ro | CMEnet.ro | rev1 | rev1 | rev1 | rev1 | rev1 | rev1 | CMEnet.ro | CMEnet.ro | CMEnet.ro | CMEnet.ro | CMEnet.ro | CMEnet.ro | rev1 | rev1 | rev1 | rev1 | rev1 | rev1
_tNames: VBAT9V+ | VBAT9V- | VBAT9V+ | VBAT9V- | VBAT9V+ | VBAT9V- | VBAT9V+ | VBAT9V- | VBAT9V+ | VBAT9V- | VBAT9V+ | VBAT9V- | S1 | S1 | S1 | S1 | S1 | S1 | T1 | T1 | T1 | T1 | T1 | T1 | R1 | R1 | R1 | R1 | R1 | R1 | JUMP1-1 | JUMP1-1 | JUMP1-1 | JUMP1-1 | JUMP1-1 | JUMP1-1 | R2 | R2 | R2 | R2 | R2 | R2 | C1 | C1 | C1 | C1 | C1 | C1 | JUMP1-2 | JUMP1-2 | JUMP1-2 | JUMP1-2 | JUMP1-2 | JUMP1-2 | INPIN1 | INPIN2 | INPIN1 | INPIN2 | INPIN2 | INPIN2 | INPIN2 | INPIN2 | INPIN1 | INPIN1 | INPIN1 | INPIN1 | VBAT9V+ | VBAT9V- | VBAT9V+ | VBAT9V- | VBAT9V- | VBAT9V- | VBAT9V- | VBAT9V- | VBAT9V+ | VBAT9V+ | VBAT9V+ | VBAT9V+ | S1 | S1 | S1 | S1 | S1 | S1 | T1 | T1 | T1 | T1 | T1 | T1 | R1 | R1 | R1 | R1 | R1 | R1 | JUMP1-1 | JUMP1-1 | JUMP1-1 | JUMP1-1 | JUMP1-1 | JUMP1-1 | R2 | R2 | R2 | R2 | R2 | R2 | C1 | C1 | C1 | C1 | C1 | C1 | JUMP1-2 | JUMP1-2 | JUMP1-2 | JUMP1-2 | JUMP1-2 | JUMP1-2 | INPIN1 | INPIN2 | INPIN1 | INPIN2 | INPIN1 | INPIN2 | INPIN1 | INPIN2 | INPIN1 | INPIN2 | INPIN1 | INPIN2 | VBAT9V+ | VBAT9V- | VBAT9V+ | VBAT9V- | VBAT9V- | VBAT9V- | VBAT9V- | VBAT9V- | VBAT9V+ | VBAT9V+ | VBAT9V+ | VBAT9V+ | S1 | S1 | S1 | S1 | S1 | S1 | T1 | T1 | T1 | T1 | T1 | T1 | R1 | R1 | R1 | R1 | R1 | R1 | JUMP1-1 | JUMP1-1 | JUMP1-1 | JUMP1-1 | JUMP1-1 | JUMP1-1 | R2 | R2 | R2 | R2 | R2 | R2 | C1 | C1 | C1 | C1 | C1 | C1 | JUMP1-2 | JUMP1-2 | JUMP1-2 | JUMP1-2 | JUMP1-2 | JUMP1-2 | INPIN1 | INPIN2 | INPIN1 | INPIN2 | INPIN1 | INPIN2 | INPIN1 | INPIN2 | INPIN1 | INPIN2 | INPIN1 | INPIN2 | VBAT9V+ | VBAT9V- | VBAT9V+ | VBAT9V- | VBAT9V+ | VBAT9V- | VBAT9V+ | VBAT9V- | VBAT9V+ | VBAT9V- | VBAT9V+ | VBAT9V- | S1 | S1 | T1 | T1 | S1 | S1 | S1 | S1 | T1 | T1 | T1 | T1 | R1 | R1 | R1 | R1 | R1 | R1 | JUMP1-1 | JUMP1-1 | JUMP1-1 | JUMP1-1 | JUMP1-1 | JUMP1-1 | R2 | R2 | R2 | R2 | R2 | R2 | C1 | C1 | C1 | C1 | C1 | C1 | JUMP1-2 | JUMP1-2 | JUMP1-2 | JUMP1-2 | JUMP1-2 | JUMP1-2 | INPIN1 | INPIN2 | INPIN1 | INPIN2 | INPIN1 | INPIN2 | INPIN1 | INPIN2 | INPIN1 | INPIN2 | INPIN1 | INPIN2
_bNames: IC1 | IC1 | IC1 | IC1 | IC1 | IC1 | IC1 | IC1 | IC1 | IC1 | IC1 | IC1 | IC1 | IC1 | IC1 | IC1 | IC1 | IC1 | IC1 | IC1 | IC1 | IC1 | IC1 | IC1
_tValues: INPIN1 | INPIN2 | INPIN1 | INPIN2 | INPIN1 | INPIN2 | INPIN1 | INPIN2 | INPIN1 | INPIN2 | INPIN1 | INPIN2 | INPIN1 | INPIN2 | INPIN1 | INPIN2 | INPIN1 | INPIN2 | INPIN1 | INPIN2 | INPIN1 | INPIN2 | INPIN1 | INPIN2 | INPIN1 | INPIN2 | INPIN1 | INPIN2 | INPIN1 | INPIN2 | INPIN1 | INPIN2 | INPIN1 | INPIN2 | INPIN1 | INPIN2 | INPIN1 | INPIN2 | INPIN1 | INPIN2 | INPIN1 | INPIN2 | INPIN1 | INPIN2 | INPIN1 | INPIN2 | INPIN1 | INPIN2